# EAGLE board eCVT 507 (EAGLE 9.5.0)
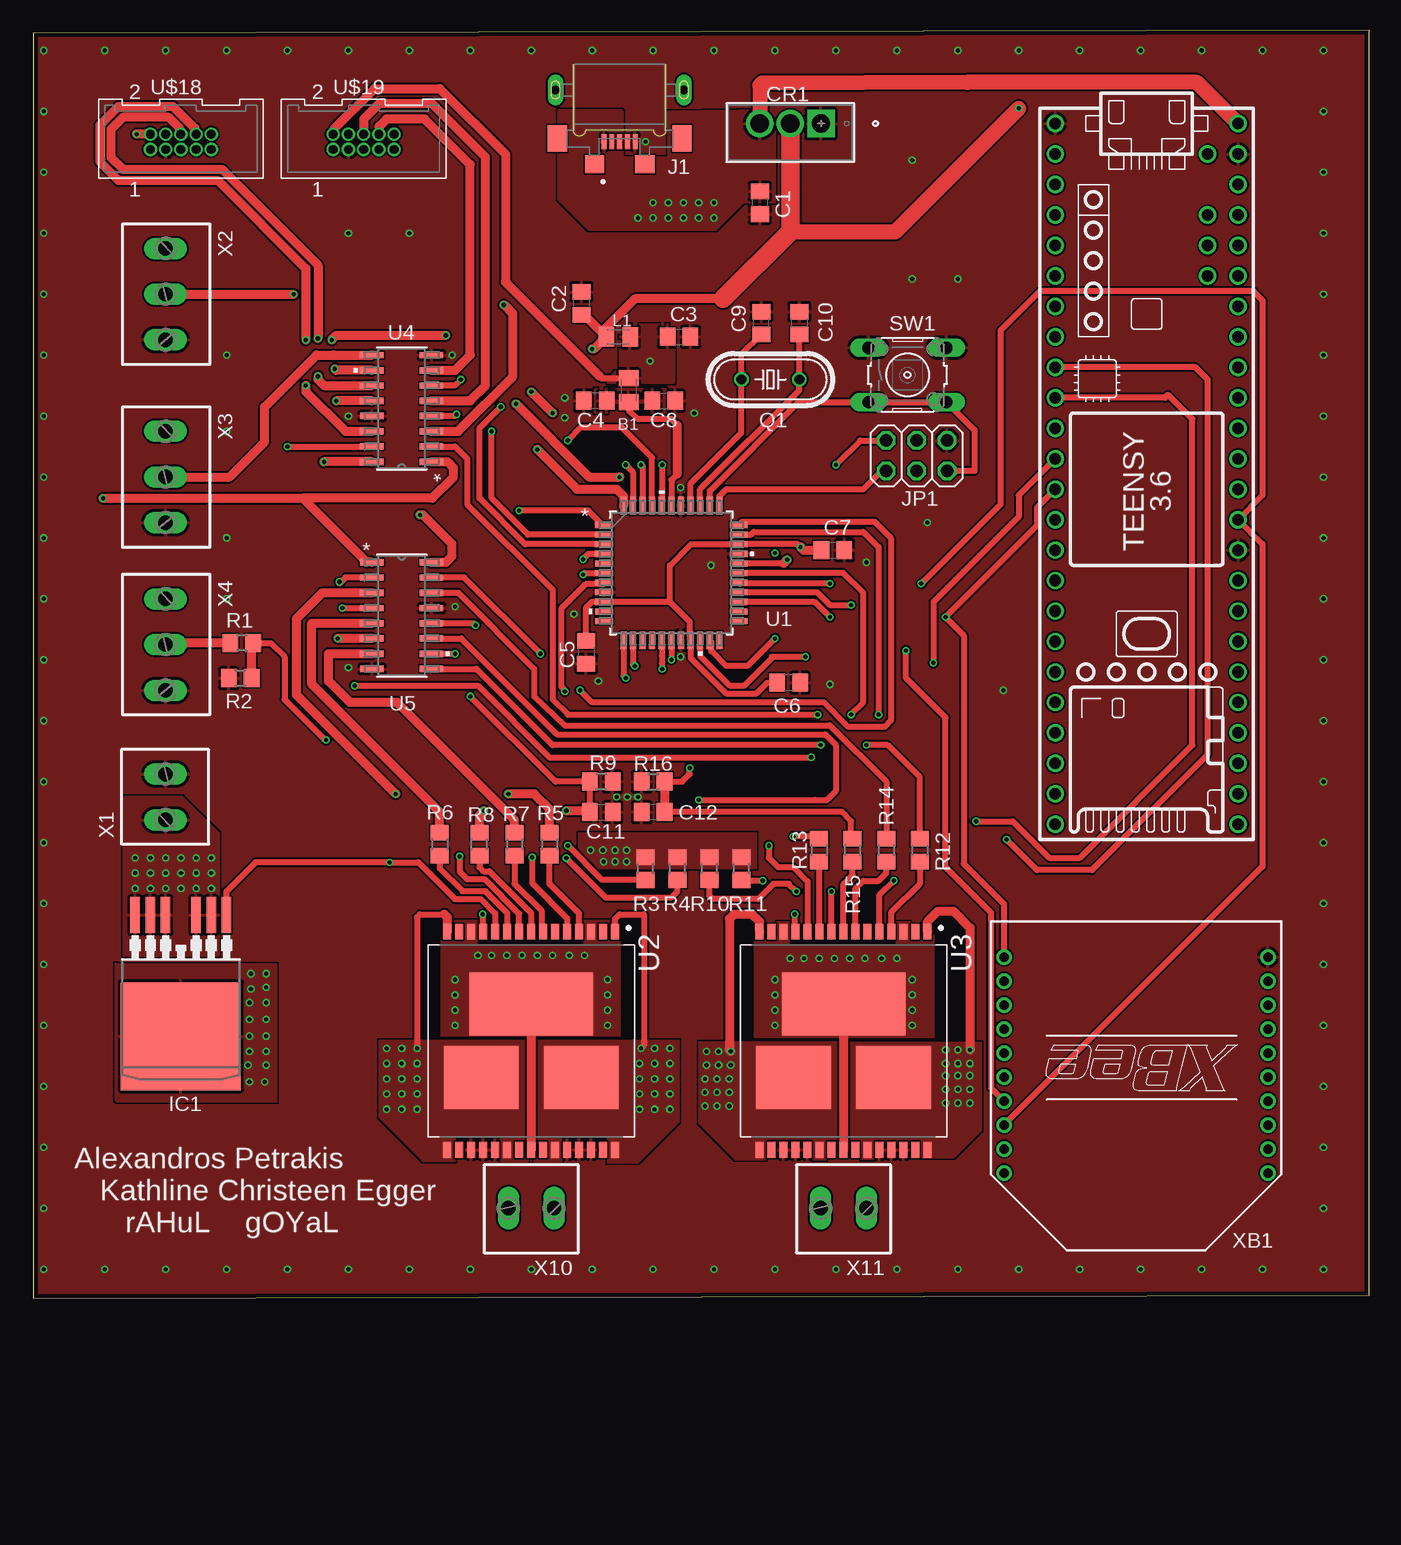
[diagram p0: board, top side]
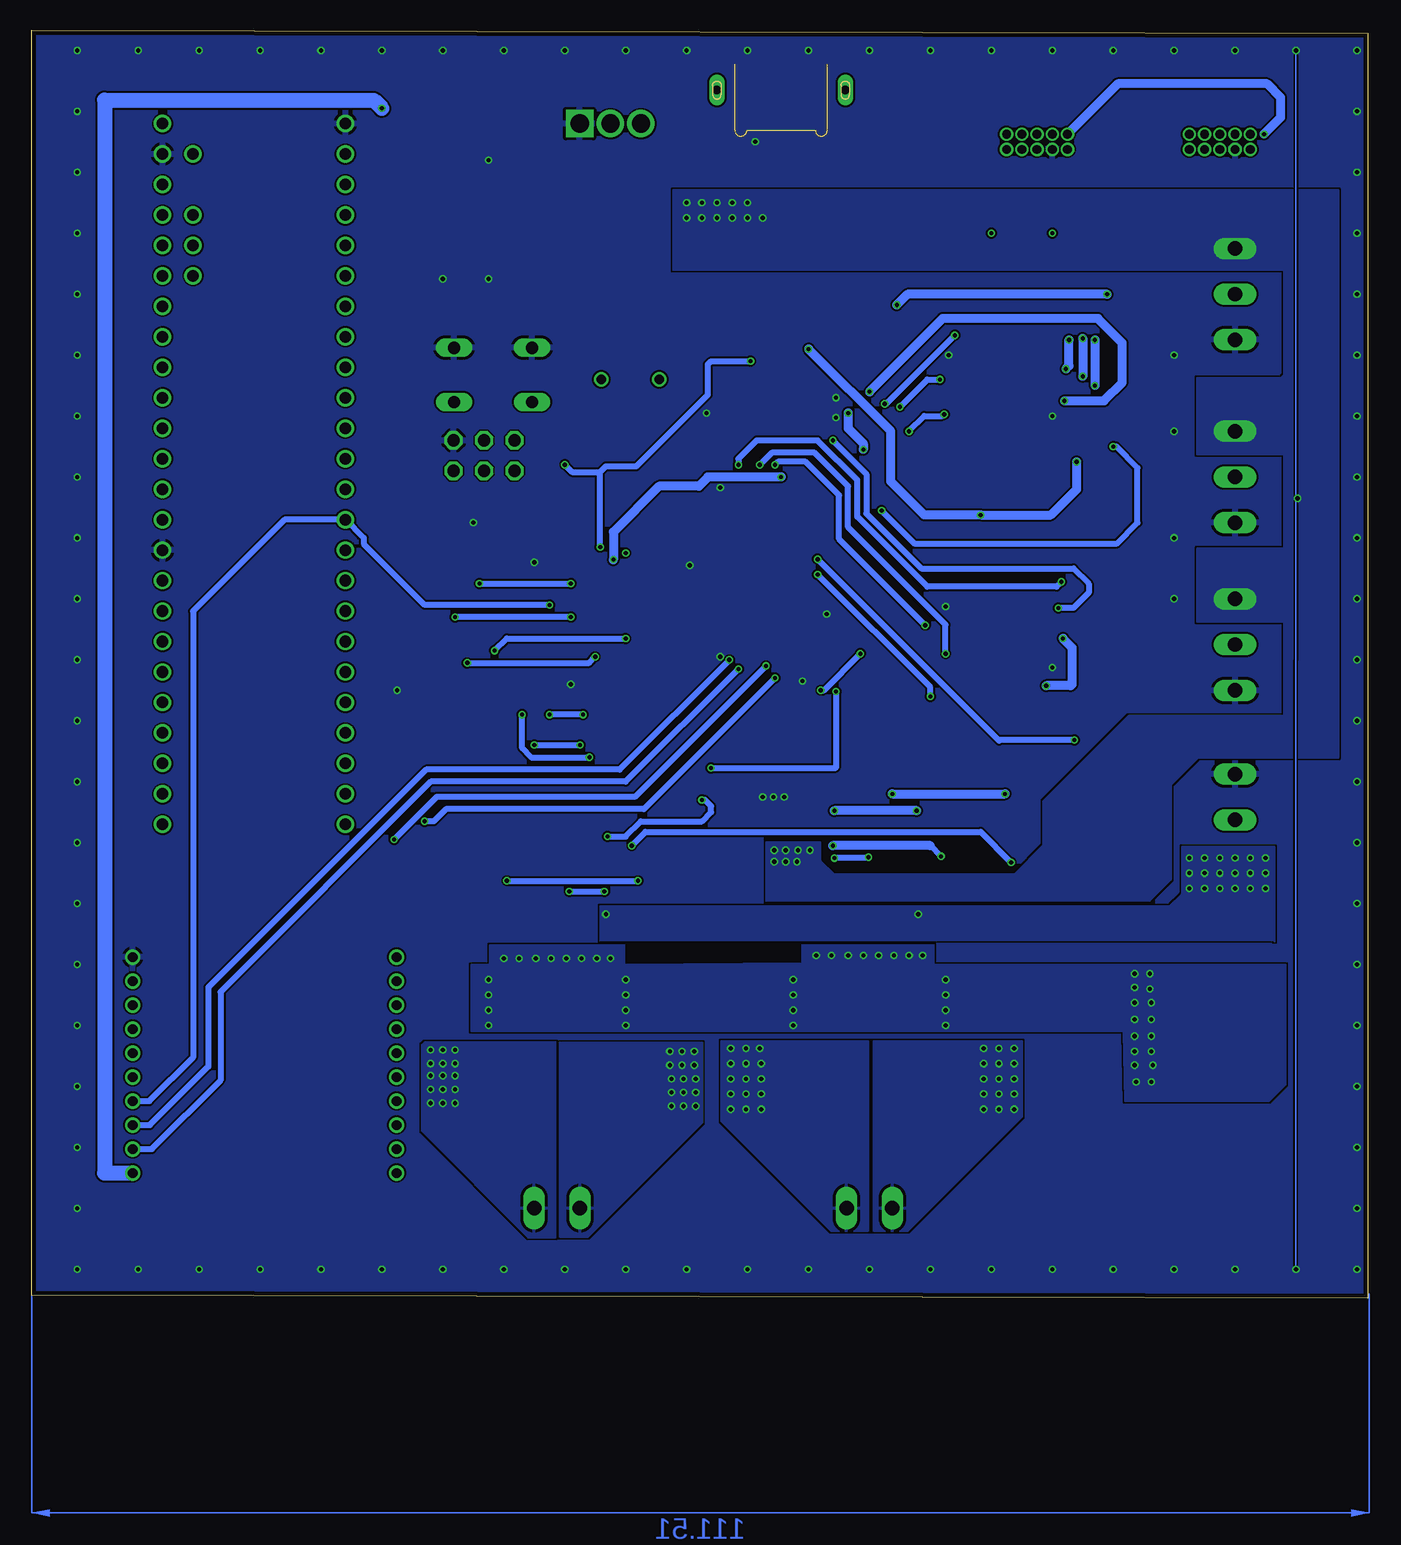
[diagram p1: board, bottom side, seen from below]

Size 111.38 x 105.72 mm. Coordinates in mm from the lower left corner, seen from the top.
Outline: 0,0 111.38,0.25 111.38,105.72 0,105.46 0,0
Copper layers (1*16): Top 0.035559375mm / dielectric 1.6mm / Bottom 0.035559375mm
Design rules "oshpark-2layer *": minimum track width 6mil, minimum drill 10mil, track to track 6mil, track to pad 6mil, pad to pad 6mil, via to via 6mil, smd to smd 6mil, copper to edge 15mil, drill to drill 6mil, minimum pad ring 5mil, minimum via ring 5mil, stop-mask expansion 2.5mil, vias tented up to drill 20mil, thermal gap 10mil

## Footprints (pad centres in the part's own frame; a part is rotated, then mirrored left to right if it is on the bottom)
0805 = smd 1.3 x 1.6: 1 -1,0; 2 1,0
C0805 = smd 1.3 x 1.5: 1 -0.95,0; 2 0.95,0
TO-220 = drill 1.524 pad 2.032 square: 1 -5.105,-1.524 | drill 1.524 pad 2.032: 2 -2.54,-1.524; 3 0,-1.524
PG-TO263-7-3 = smd 0.8 x 3: 1 -3.81,-9.207; 2 -2.54,-9.207; 3 -1.27,-9.207; 5 1.27,-9.207; 6 2.54,-9.207; 7 3.81,-9.207 | smd 10 x 9: 8 0,0.895
CUI_UJ2-MIBH-4-MSMT = smd 1.25 x 0.4: 1 4.325,-1.3; 2 4.325,-0.65; 3 4.325,0; 4 4.325,0.65; 5 4.325,1.3 | drill 0.7 pad 1.3 long: S1 0,5.35; S4 0,-5.35 | smd 2.2 x 1.6: S2 4.05,5.2; S5 4.05,-5.2 | smd 1.5 x 1.6: S3 6.2,2.1; S6 6.2,-2.1
2X03 = drill 1.016 octagon: 1 -2.54,-1.27; 2 -2.54,1.27; 3 0,-1.27; 4 0,1.27; 5 2.54,-1.27; 6 2.54,1.27
HC49/S = drill 0.813: 1 -2.413,0; 2 2.413,0
R0805 = smd 1.3 x 1.5: 1 -0.95,0; 2 0.95,0
B3F-10XX = drill 1.016 long: 1 -3.251,2.261; 2 3.251,2.261; 3 -3.251,-2.261; 4 3.251,-2.261
44A = smd 1.473 x 0.508: 1 -5.613,4; 2 -5.613,3.2; 3 -5.613,2.4; 4 -5.613,1.6; 5 -5.613,0.8; 6 -5.613,0; 7 -5.613,-0.8; 8 -5.613,-1.6; 9 -5.613,-2.4; 10 -5.613,-3.2; 11 -5.613,-4; 23 5.613,-4; 24 5.613,-3.2; 25 5.613,-2.4; 26 5.613,-1.6; 27 5.613,-0.8; 28 5.613,0; 29 5.613,0.8; 30 5.613,1.6; 31 5.613,2.4; 32 5.613,3.2; 33 5.613,4 | smd 0.508 x 1.473: 12 -4,-5.613; 13 -3.2,-5.613; 14 -2.4,-5.613; 15 -1.6,-5.613; 16 -0.8,-5.613; 17 0,-5.613; 18 0.8,-5.613; 19 1.6,-5.613; 20 2.4,-5.613; 21 3.2,-5.613; 22 4,-5.613; 34 4,5.613; 35 3.2,5.613; 36 2.4,5.613; 37 1.6,5.613; 38 0.8,5.613; 39 0,5.613; 40 -0.8,5.613; 41 -1.6,5.613; 42 -2.4,5.613; 43 -3.2,5.613; 44 -4,5.613
IC_VNH5019ATR-E = smd 1.3 x 0.665: 1 -9.1,7; 2 -9.1,6; 3 -9.1,5; 4 -9.1,4; 5 -9.1,3; 6 -9.1,2; 7 -9.1,1; 8 -9.1,0; 9 -9.1,-1; 10 -9.1,-2; 11 -9.1,-3; 12 -9.1,-4; 13 -9.1,-5; 14 -9.1,-6; 15 -9.1,-7; 16 9.1,-7; 17 9.1,-6; 18 9.1,-5; 19 9.1,-4; 20 9.1,-3; 21 9.1,-2; 22 9.1,-1; 23 9.1,0; 24 9.1,1; 25 9.1,2; 26 9.1,3; 27 9.1,4; 28 9.1,5; 29 9.1,6; 30 9.1,7 | smd 5.25 x 10.3: HS1 -3.05,0 | smd 5.25 x 6.23: HS2 3.05,4.165; HS3 3.05,-4.165
SOIC-16 = smd 1.956 x 0.533: 1 -2.477,4.445; 2 -2.477,3.175; 3 -2.477,1.905; 4 -2.477,0.635; 5 -2.477,-0.635; 6 -2.477,-1.905; 7 -2.477,-3.175; 8 -2.477,-4.445; 9 2.477,-4.445; 10 2.477,-3.175; 11 2.477,-1.905; 12 2.477,-0.635; 13 2.477,0.635; 14 2.477,1.905; 15 2.477,3.175; 16 2.477,4.445
TEENSY_3.5/3.6_BASIC = drill 0.965: 0/RX -25.4,-7.62; 1/TX -22.86,-7.62; 2 -20.32,-7.62; 3/CANTX -17.78,-7.62; 3V3 7.62,-7.62; 3V3_LO -22.86,7.62; 4/CANRX -15.24,-7.62; 5 -12.7,-7.62; 6 -10.16,-7.62; 7 -7.62,-7.62; 8 -5.08,-7.62; 9/CS -2.54,-7.62; 10/CS 0,-7.62; 11/MOSI 2.54,-7.62; 12/MISO 5.08,-7.62; 13/SCK 5.08,7.62; 14/A0 2.54,7.62; 15/A1 0,7.62; 16/A2 -2.54,7.62; 17/A3 -5.08,7.62; 18/A4/SDA -7.62,7.62; 19/A5/SCL -10.16,7.62; 20/A6 -12.7,7.62; 21/A7 -15.24,7.62; 21/DAC0 12.7,7.62; 22/A8 -17.78,7.62; 23/A9 -20.32,7.62; 24 10.16,-7.62; 25 12.7,-7.62; 26 15.24,-7.62; 27 17.78,-7.62; 28 20.32,-7.62; 29 22.86,-7.62; 30 25.4,-7.62; 31/A12 27.94,-7.62; 32/A13 30.48,-7.62; 33/A14 30.48,7.62; 34/A15 27.94,7.62; 35/A16 25.4,7.62; 36/A17 22.86,7.62; 37/A18 20.32,7.62; 38/A19 17.78,7.62; 39/A20 15.24,7.62; A10 -17.78,5.08; A11 -15.24,5.08; A22/DAC1 10.16,7.62; AGND -25.4,7.62; AREF -20.32,5.08; GND -27.94,-7.62; GND2 7.62,7.62; VIN -27.94,7.62; VUSB -25.4,5.08
SHF-105-01-X-D-TH = drill 0.737 pad 1.067: 1 -2.54,-0.635; 2 -2.54,0.635; 3 -1.27,-0.635; 4 -1.27,0.635; 5 0,-0.635; 6 0,0.635; 7 1.27,-0.635; 8 1.27,0.635; 9 2.54,-0.635; 10 2.54,0.635
2POL381 = drill 1.2 long: 1 -1.905,0; 2 1.905,0
3POL381 = drill 1.2 long: 1 -3.81,0; 2 0,0; 3 3.81,0
XBEE = drill 0.8 pad 1.27: 1 -11,9; 2 -11,7; 3 -11,5; 4 -11,3; 5 -11,1; 6 -11,-1; 7 -11,-3; 8 -11,-5; 9 -11,-7; 10 -11,-9; 11 11,-9; 12 11,-7; 13 11,-5; 14 11,-3; 15 11,-1; 16 11,1; 17 11,3; 18 11,5; 19 11,7; 20 11,9

## Placement (x,y rotation side)
B1  220@100MHz  [0805]  49.66,75.69 270 top
C1  100nF  [C0805]  60.58,91.31 270 top
C2  10uF  [C0805]  45.72,82.93 90 top
C3  10uF  [C0805]  53.85,80.14 0 top
C4  10uF  [C0805]  46.86,74.8 180 top
C5  0.1uF  [C0805]  46.1,53.85 270 top
C6  0.1uF  [C0805]  62.99,51.31 0 top
C7  0.1uF  [C0805]  66.67,62.36 0 top
C8  0.1uF  [C0805]  52.58,74.8 0 top
C9  30pF  [C0805]  60.71,81.28 90 top
C10  30pF  [C0805]  63.88,81.28 90 top
C11  33 nF  [C0805]  47.37,40.51 0 top
C12  33 nF  [C0805]  51.69,40.51 180 top
CR1  LD1117V33  [TO-220]  60.58,96.39 180 top
IC1  IPB180N06S4-H1  [PG-TO263-7-3]  12.32,22.73 180 top
J1  UJ2-MIBH-4-MSMT  [CUI_UJ2-MIBH-4-MSMT]  48.9,100.71 270 top
JP1  [2X03]  73.66,70.23 0 top
L1  10uH  [0805]  48.77,80.14 0 top
Q1  16MHz 18pF  [HC49/S]  61.47,76.58 0 top
R1  1.7K  [R0805]  17.4,54.61 180 top
R2  3.3K  [R0805]  17.27,51.69 0 top
R3  3.3K  [R0805]  51.05,35.81 90 top
R4  3.3K  [R0805]  53.72,35.81 90 top
R5  1K  [R0805]  43.05,37.85 270 top
R6  1K  [R0805]  33.91,37.85 270 top
R7  1K  [R0805]  40.13,37.85 270 top
R8  10K  [R0805]  37.21,37.85 90 top
R9  1.5K  [R0805]  47.37,43.05 180 top
R10  3.3K  [R0805]  56.39,35.81 90 top
R11  3.3K  [R0805]  59.05,35.81 90 top
R12  1K  [R0805]  73.91,37.34 270 top
R13  1K  [R0805]  65.53,37.34 270 top
R14  1K  [R0805]  71.12,37.34 270 top
R15  10K  [R0805]  68.33,37.34 90 top
R16  1.5K  [R0805]  51.69,43.05 0 top
SW1  SW  [B3F-10XX]  72.9,76.96 0 top
U1  ATXMEGA128A4U-AU  [44A]  53.21,60.45 0 top
U2  VNH5019ATR-E  [IC_VNH5019ATR-E]  41.53,21.46 270 top
U3  VNH5019ATR-E  [IC_VNH5019ATR-E]  67.56,21.46 270 top
U4  MC14504BDR2G  [SOIC-16]  30.73,74.17 180 top
U5  MC14504BDR2G  [SOIC-16]  30.73,56.9 0 top
U$3  TEENSY_3.5/3.6_BASIC  [TEENSY_3.5/3.6_BASIC]  92.84,69.98 270 top
U$18  SHF-105-01-X-D-TH  [SHF-105-01-X-D-TH]  12.32,96.39 0 top
U$19  SHF-105-01-X-D-TH  [SHF-105-01-X-D-TH]  27.56,96.39 0 top
X1  [2POL381]  11.05,41.78 90 top
X2  [3POL381]  11.05,83.69 270 top
X3  [3POL381]  11.05,68.45 270 top
X4  [3POL381]  11.05,54.48 270 top
X10  [2POL381]  41.53,7.49 180 top
X11  [2POL381]  67.56,7.49 180 top
XB1  XBEE  [XBEE]  91.95,19.43 180 top

## Library data of the parts
B1 L1 X1-X4 X10 X11 = ME507
C1-C12 = rcl; SPICEPREFIX: C
CR1 = LD1117V33; MANUFACTURER_PART_NUMBER: LD1117V33; VENDOR: STMicroelectronics
IC1 = infineon
J1 = UJ2-MIBH-4-MSMT; CUI_PURCHASE_URL: https://www.cuidevices.com/product/interconnect/connectors/usb-connectors/uj2-mibh-4-msmt?utm_source=snapeda.com&utm_medium=referral&utm_campaign=snapedaBOM; DESCRIPTION: Micro B, USB 2.0, 1.8 A, Right Angle, Mid Mount _SMT_, USB Receptacle; DIGI-KEY_PART_NUMBER: 102-4008-1-ND; DIGI-KEY_PURCHASE_URL: https://www.digikey.com/product-detail/en/cui-devices/UJ2-MIBH-4-MSMT-TR/102-4008-1-ND/6187930?utm_source=snapeda&utm_medium=aggregator&utm_campaign=symbol; MF: CUI Devices; MP: UJ2-MIBH-4-MSMT-TR; PACKAGE: None
JP1 = pinhead
Q1 = crystal; OC_FARNELL: 1667008; OC_NEWARK: unknown
R1-R16 = rcl; SPICEPREFIX: R
SW1 = ME507; MPN: B3F-1000; OC_FARNELL: 176432; OC_NEWARK: 36M3542
U1 = XMEGA; MANUFACTURER_PART_NUMBER: ATXMEGA128A4UAU; VENDOR: Atmel
U2 U3 = VNH5019ATR-E; DESCRIPTION: Motor / Motion / Ignition Controllers & Drivers Automotive h-Bridge 18mohm 30a 41v Vcc; DIGI-KEY_PART_NUMBER: 497-13073-1-ND; DIGI-KEY_PURCHASE_URL: https://www.digikey.com/product-detail/en/stmicroelectronics/VNH5019ATR-E/497-13073-1-ND/3455763?utm_source=snapeda&utm_medium=aggregator&utm_campaign=symbol; MF: STMicroelectronics; MP: VNH5019ATR-E; PACKAGE: SOP-30 STMicroelectronics
U4 U5 = MC14504BDR2G; MANUFACTURER_PART_NUMBER: MC14504BDR2G; VENDOR: ON Semiconductor
U$3 = Teensy356
U$18 U$19 = SHF-105-01-X-D-TH; DESCRIPTION: SHF Series .050 Shrouded Terminal Strip For FFSD; DIGI-KEY_PART_NUMBER: SAM10711-ND; DIGI-KEY_PURCHASE_URL: https://www.digikey.com/product-detail/en/samtec-inc/SHF-105-01-L-D-TH/SAM10711-ND/6561671?utm_source=snapeda&utm_medium=aggregator&utm_campaign=symbol; MF: Samtec; MP: SHF-105-01-L-D-TH; PACKAGE: None
XB1 = xbee; MPN: XBP24-Z7UIT-004; OC_FARNELL: 1751799; OC_NEWARK: 34R5507

## Nets
+3V3: C2.1 CR1.2 L1.1 U4.16 U5.16 XB1.1
+5V: C1.1 CR1.3 J1.1 R3.2 R4.2 R10.2 R11.2 U4.1 U5.1 U$3.VIN X2.1 X3.1 X4.1
+12V: IC1.2 IC1.3 IC1.5 IC1.6 IC1.7 U2.12 U3.12 X1.1
AVCC: B1.2 C4.1 C8.1 U1.39
BRAKE_PRESSURE: R1.1 R2.2 U1.4
DRIVER_CP: IC1.1 U2.11 U3.11
DRIVER_VCC: IC1.8 U2.3 U2.13 U2.23 U2.HS1 U3.3 U3.13 U3.23 U3.HS1
ENGINE_SPEED: U4.3 X2.2
ENGINE_SPEED_3V3: U1.28 U4.2
GND: C1.2 C2.2 C3.2 C4.2 C5.2 C6.2 C7.2 C8.2 C9.2 C10.2 C11.2 C12.2 CR1.1 J1.5 JP1.6 R2.1 R9.1 R16.1 SW1.1 SW1.2 U1.8 U1.18 U1.30 U1.38 U2.18 U2.19 U2.20 U2.26 U2.27 U2.28 U3.18 U3.19 U3.20 U3.26 U3.27 U3.28 U4.8 U4.13 U5.8 U5.13 U$3.AGND U$3.GND U$3.GND2 U$18.3 U$19.3 X1.2 X2.3 X3.3 X4.3 XB1.10
MISO: U1.26 U$3.12/MISO XB1.4
MOSI: U1.25 U$3.11/MOSI XB1.11
N$1: U1.22
N$2: U1.14
N$3: U1.15
N$4: R11.1 U3.5
N$5: R5.2 U2.4
N$6: R10.1 U3.9
N$7: JP1.3
N$8: U$3.0/RX
N$9: U$3.1/TX
N$10: R4.1 U2.5
N$11: XB1.5
N$12: R6.2 U2.10
N$13: R8.1 U2.8
N$14: JP1.4
N$16: U2.15 U2.16 U2.21 U2.HS3 X10.2
N$17: U2.1 U2.25 U2.30 U2.HS2 X10.1
N$18: R3.1 U2.9
N$19: R7.2 U2.7
N$20: XB1.6
N$21: XB1.9
N$23: U1.24
N$26: U1.5
N$28: R12.2 U3.4
N$29: R13.2 U3.10
N$30: R14.2 U3.7
N$31: R15.1 U3.8
N$33: U3.15 U3.16 U3.21 U3.HS3 X11.2
N$34: U3.1 U3.25 U3.30 U3.HS2 X11.1
N$37: U$18.1
N$38: U$19.1
N$39: R1.2 X4.2
N$40: XB1.14
N$41: XB1.12
N$42: XB1.13
N$43: XB1.15
N$44: XB1.16
N$45: U1.23
N$46: U2.6
N$47: XB1.19
N$48: U1.10
N$50: XB1.20
N$77: U$18.5
N$78: U$18.7
N$79: U$18.9
N$80: U$18.4
N$81: U$18.10
N$82: U$19.5
N$83: U$19.7
N$84: U$19.9
N$85: U$19.4
N$86: U$19.10
N$87: U$3.2
N$88: U$3.3/CANTX
N$89: U$3.4/CANRX
N$90: U$3.5
N$91: U$3.6
N$92: U$3.9/CS
N$93: U$3.3V3
N$94: U$3.24
N$95: U$3.25
N$96: U$3.26
N$97: U$3.27
N$98: U$3.28
N$99: U$3.29
N$100: U$3.30
N$101: U$3.31/A12
N$102: U$3.32/A13
N$103: U$3.33/A14
N$104: U$3.34/A15
N$105: U$3.35/A16
N$106: U$3.36/A17
N$107: U$3.37/A18
N$108: U$3.38/A19
N$109: U$3.39/A20
N$110: U$3.21/DAC0
N$111: U$3.A22/DAC1
N$114: U$3.14/A0
N$115: U$3.15/A1
N$116: U$3.16/A2
N$117: U$3.17/A3
N$118: U$3.18/A4/SDA
N$119: U$3.19/A5/SCL
N$120: U$3.20/A6
N$121: U$3.21/A7
N$122: U$3.22/A8
N$123: U$3.23/A9
N$124: U$3.3V3_LO
N$128: U1.11
N$129: U$3.A11
N$130: U$3.A10
N$131: U$3.AREF
N$132: U$3.VUSB
N$133: U3.6
PDI_DATA: JP1.1 U1.34
PENC_INA: U4.11 U$18.6
PENC_INA_3V3: U1.44 U4.12
PENC_INB: U4.14 U$18.8
PENC_INB_3V3: U1.1 U4.15
PMOT_CS: C11.1 R8.2 R9.2 U1.6
PMOT_INA: R5.1 U5.3
PMOT_INA_3V3: U1.40 U5.2
PMOT_INB: R6.1 U5.5
PMOT_INB_3V3: U1.41 U5.4
PMOT_PWM: R7.1 U5.7
PMOT_PWM_3V3: U1.32 U5.6
RESET/PDI_CLK: JP1.5 SW1.3 SW1.4 U1.35
RWHEEL_SPEED: U4.9 X3.2
RWHEEL_SPEED_3V3: U1.29 U4.10
SCK: U1.27 U$3.13/SCK XB1.18
SENC_INA: U4.5 U$19.6
SENC_INA_3V3: U1.2 U4.4
SENC_INB: U4.7 U$19.8
SENC_INB_3V3: U1.3 U4.6
SMOT_CS: C12.1 R15.2 R16.2 U1.7
SMOT_INA: R12.1 U5.9
SMOT_INA_3V3: U1.42 U5.10
SMOT_INB: R13.1 U5.11
SMOT_INB_3V3: U1.43 U5.12
SMOT_PWM: R14.1 U5.14
SMOT_PWM_3V3: U1.33 U5.15
TEENSY_RX: U1.12 U$3.8
TEENSY_SS: U1.20 U$3.10/CS
TEENSY_TX: U1.13 U$3.7
VCC: B1.1 C3.1 C5.1 C6.1 C7.1 JP1.2 L1.2 U1.9 U1.19 U1.31 U$18.2 U$19.2
XBEE_RX: U1.16 XB1.2
XBEE_SS: U1.21 XB1.17
XBEE_TX: U1.17 XB1.3
XTAL1: C9.1 Q1.1 U1.37
XTAL2: C10.1 Q1.2 U1.36

## Tracks (layer width: path | path; a pad name or v marks a point on that pad's centre or on a via)
+3V3  (via drill 0.35)
  Top 0.762: U4.16 v24.26,69.72 | L1.1 45.87,82.04 C2.1 | L1.1 47.75,80.14 47.75,80.9 50.16,83.31 57.53,83.31 | L1.1 46.75,79.12 v46.61,79.12 | U5.16 34.42,61.34 34.92,61.85 34.92,62.86 32.51,65.28 v32.26,65.28
  Top 1.27: 63.12,88.9 71.88,88.9 v82.17,99.19
  Top 1.524: CR1.2 63.12,88.9 57.53,83.31
  Bottom 0.762: v46.61,79.12 39.75,72.26 39.75,68.07 36.96,65.28 v32.26,65.28 26.42,65.28 24.26,67.44 v24.26,69.72
  Bottom 1.27: XB1.1 105.28,10.43 105.28,99.88 87.25,99.86 82.84,99.86 v82.17,99.19
+5V  (via drill 0.35)
  Top 0.762: v5.84,66.67 22.48,66.67 | U5.1 27.81,61.34 22.48,66.67 | U4.1 34.54,69.72 35.05,69.22 35.05,68.45 33.27,66.67 22.48,66.67
  Top 1.27: U$3.VIN 97.03,101.35 77.86,101.35 77.85,101.36 60.77,101.28 60.58,101.09 CR1.3
  other vias: 46.48,37.34 47.5,37.34 48.51,37.34 50.42,90.04 51.69,90.04 52.96,90.04 54.23,90.04 55.5,90.04 56.77,90.04 56.77,91.31 55.5,91.31 54.23,91.31 52.96,91.31 51.69,91.31 49.47,37.34 49.47,36.39 48.51,36.39 47.56,36.39
  pour Top (no thermals): 45.47,38.73 45.47,35.88 60.33,35.88 60.33,38.73
  pour Top: 61.85,91.31 59.18,91.31 56.9,89.03 46.36,89.03 43.82,91.57 43.82,99.06 49.02,99.06 49.15,98.93 49.15,95.12 52.96,95.12 52.96,98.93 61.72,99.06 61.85,98.93
  pour Bottom (no thermals): 2.41,92.36 57.91,92.36 57.91,85.72 6.98,85.72 6.98,76.96 7.24,76.71 14.22,76.71 14.22,70.36 6.98,70.36 6.98,62.48 14.22,62.48 14.22,56.39 6.98,56.39 6.98,48.51 19.94,48.51 27.05,41.4 27.05,37.72 29.46,35.31 44.45,35.31 45.59,36.45 45.59,37.97 50.16,37.97 50.16,33.15 18.16,33.15 16.38,34.92 16.38,42.8 14.1,45.08 2.41,45.08
+12V  (via drill 0.35)
  Top 0.508: U2.12 37.53,31.94 v37.47,32 | U3.12 63.5,30.63 v63.5,32
  other vias: 8.51,34.16 8.51,35.43 8.51,36.7 9.78,36.7 9.78,35.43 9.78,34.16 11.05,34.16 11.05,35.43 11.05,36.7 12.32,36.7 13.59,36.7 14.86,36.7 14.86,35.43 13.59,35.43 12.32,35.43 12.32,34.16 13.59,34.16 14.86,34.16
  pour Top: 7.49,28.57 15.49,28.57 15.49,38.73 12.45,41.78 7.49,41.78
  pour Bottom: 7.75,37.59 15.49,37.59 15.49,33.66 16.51,32.64 64.01,32.64 64.01,29.84 7.87,29.84 7.75,29.72
AVCC
  Top 0.508: 53.72,68.71 53.21,68.2 U1.39 | 53.72,72.77 53.21,73.28 50.42,73.28 49.66,74.04 B1.2
  Top 0.762: 53.72,68.71 53.72,72.77
  pour Top: 47.88,75.82 52.71,75.82 52.71,73.79 46.86,73.79 46.86,75.82
BRAKE_PRESSURE  (via drill 0.35)
  Top 0.508: R1.1 19.81,54.61 20.95,53.47 20.95,49.91 24.26,46.61 24.51,46.61 v24.44,46.54 | v45.85,61.59 46.3,62.05 U1.4
  Top 0.762: R2.2 18.22,54.48 R1.1
  Bottom 0.508: v24.44,46.54 30.68,46.54 30.73,46.48 v45.85,61.59
DRIVER_CP  (via drill 0.35)
  Top 0.508: IC1.1 16.13,33.91 18.54,36.32 v29.72,36.32 32.13,36.32 35.18,33.27 37.34,33.27 38.53,32.08 U2.11 | U3.11 64.56,33.66 64.56,33.99 64.56,34.75 63.37,35.94 62.1,35.94 61.34,36.7 v61.34,37.72
  Bottom 0.508: v29.72,36.32 32.26,38.86 60.2,38.86 v61.34,37.72
DRIVER_VCC  (via drill 0.35)
  Top 0.762: U2.HS1 U2.23 | U3.HS1 U3.23
  other vias: 19.43,27.05 18.16,27.05 19.43,25.91 18.16,25.78 19.43,24.64 18.03,24.64 19.43,23.24 18.03,23.24 19.43,21.84 18.03,21.84 19.43,20.57 18.03,20.57 19.43,19.43 17.91,19.43 19.3,18.03 18.03,18.03 37.08,28.57 38.23,28.57 39.5,28.57 40.77,28.57 42.04,28.57 43.31,28.57 44.7,28.57 45.97,28.57 63.12,28.32 64.26,28.32 65.53,28.32 66.8,28.32 68.07,28.32 69.34,28.32 70.74,28.32 72.01,28.32 35.18,26.54 35.18,25.27 35.18,24 35.18,22.73 47.88,26.54 47.88,25.27 47.88,24 47.88,22.73 61.85,26.54 61.85,25.27 61.85,24 61.85,22.73 73.28,26.54 73.28,25.27 73.28,24 73.28,22.73
  pour Bottom: 6.86,27.81 6.86,17.78 8.25,16.38 20.19,16.38 20.32,22.23 74.68,22.23 74.68,27.81 73.15,27.81 73.15,29.46 61.98,29.46 61.98,27.81 47.12,27.94 47.12,29.46 36.2,29.46 36.2,27.81
  pour Top: 6.86,27.94 6.86,16.51 6.98,16.38 20.32,16.38 20.32,27.81 6.98,27.81
  pour Top (no thermals): 34.04,21.84 34.04,31.5 36.96,31.5 36.96,29.46 45.97,29.46 45.97,31.5 48.9,31.5 48.9,21.84
  pour Top (no thermals): 60.2,21.72 60.2,31.37 62.99,31.37 62.99,29.34 72.01,29.34 72.01,31.37 75.06,31.37 75.06,21.72
ENGINE_SPEED  (via drill 0.35)
  Top 0.762: X2.2 v21.72,83.69 | v39.24,82.8 40.01,82.04 40.01,76.83 35.43,72.26 U4.3
  Bottom 0.762: v21.72,83.69 38.35,83.69 v39.24,82.8
ENGINE_SPEED_3V3  (via drill 0.35)
  Top 0.508: U4.2 35.18,70.99 36.2,69.98 36.2,66.17 43.31,59.05 43.31,49.91 44.58,48.64 v65.41,48.64 | v68.2,48.64 69.22,49.66 69.22,58.8 67.55,60.46 58.84,60.46 U1.28
  Bottom 0.508: v65.41,48.64 v68.2,48.64
GND  (via drill 0.35)
  other vias: 45.09,57.02 47.12,51.43 56.52,61.09 73.28,94.87 66.42,51.18 0.89,104.01 0.89,93.85 0.89,98.93 0.89,88.77 0.89,83.69 0.89,78.61 0.89,73.53 0.89,68.45 0.89,63.37 0.89,58.29 0.89,53.21 0.89,48.13 0.89,43.05 0.89,37.97 0.89,32.89 0.89,27.81 0.89,22.73 0.89,17.65 0.89,12.57 0.89,7.49 0.89,2.41 5.97,2.41 11.05,2.41 16.13,2.41 21.21,2.41 26.29,2.41 31.37,2.41 36.45,2.41 41.53,2.41 46.61,2.41 51.69,2.41 56.77,2.41 61.85,2.41 66.93,2.41 72.01,2.41 77.09,2.41 82.17,2.41 87.25,2.41 92.33,2.41 97.41,2.41 102.49,2.41 107.57,2.41 107.57,7.49 107.57,12.57 107.57,17.65 107.57,22.73 107.57,27.81 107.57,32.89 107.57,37.97 107.57,43.05 107.57,48.13 107.57,53.21 107.57,58.29 107.57,63.37 107.57,68.45 107.57,73.53 107.57,78.61 107.57,83.69 107.57,88.77 107.57,93.85 107.57,98.93 107.57,104.01 102.49,104.01 97.41,104.01 92.33,104.01 87.25,104.01 82.17,104.01 77.09,104.01 72.01,104.01 66.93,104.01 61.85,104.01 56.77,104.01 51.69,104.01 46.61,104.01 41.53,104.01 36.45,104.01 31.37,104.01 26.29,104.01 21.21,104.01 16.13,104.01 11.05,104.01 5.97,104.01 51.05,96.39 26.29,73.53 26.29,52.58 34.92,78.61 35.18,57.66 55.12,73.79 44.32,73.41 44.32,75.06 53.98,67.56 53.98,53.47 49.53,41.78 48.64,41.78 50.42,41.78 16.13,58.29 16.13,63.37 16.13,72.26 16.13,78.61 26.29,88.77 31.37,88.77 73.28,84.96 77.09,84.96 74.55,64.64 80.9,50.67 69.47,61.34
  pour Top (rank 6): -1.4,104.27 -1.4,-0.13 113.28,-0.13 113.28,105.28 -0.38,105.28
  pour Bottom (rank 6): -0.13,106.05 -0.13,-0.89 114.17,-0.89 114.17,106.3 0.13,106.3
MISO  (via drill 0.35)
  Top 0.508: U1.26 65.35,58.85 66.42,57.78 v68.2,57.78
  Bottom 0.508: v68.2,57.78 78.61,57.78 83.69,62.86 83.69,63.37 U$3.12/MISO 90.3,64.9 97.92,57.28 97.92,20.07 101.55,16.43 XB1.4
MOSI  (via drill 0.35)
  Top 0.508: U1.25 65.14,58.05 v66.42,56.77 | U$3.11/MOSI 83.69,65.91 83.69,64.39 v76.07,56.77 77.6,55.24 77.6,36.19 80.95,32.84 XB1.11
  Bottom 0.508: v66.42,56.77 v76.07,56.77
N$4  (via drill 0.35)
  Top 0.508: U3.5 70.56,33.61 v71.75,34.8 | v60.83,34.8 59.12,34.8 R11.1
  Bottom 0.508: v71.75,34.8 v60.83,34.8
N$5
  Top 0.508: R5.2 43.05,34.54 45.53,32.07 U2.4
N$6  (via drill 0.35)
  Top 0.508: U3.9 66.55,30.58 v66.55,33.91 | v63.63,33.91 62.99,34.54 61.72,34.54 60.45,33.27 56.64,33.27 56.39,33.53 R10.1
  Bottom 0.508: v66.55,33.91 v63.63,33.91
N$10  (via drill 0.35)
  Top 0.508: v44.45,36.68 47.73,33.4 53.21,33.4 53.72,33.91 R4.1 | v41.61,36.76 41.61,34.59 44.53,31.67 U2.5
  Bottom 0.508: v41.61,36.76 41.66,36.7 44.45,36.7 v44.45,36.68
N$12
  Top 0.508: R6.2 33.91,35.81 35.79,33.93 37.69,33.93 39.53,32.1 U2.10
N$13
  Top 0.508: R8.1 37.21,35.94 37.57,35.58 38.04,35.58 41.53,32.09 U2.8
N$15  (via drill 0.35)
  other vias: 61.85,62.1
N$16  (via drill 0.35)
  Top 0.508: v32,20.83 32,31.75 32.26,32 34.29,32
  Top 0.762: 34.29,32 34.53,31.77 U2.15
  other vias: 29.46,15.75 30.73,15.75 32,15.75 29.46,17.02 30.73,17.02 32,17.02 32,18.29 30.73,18.29 29.46,18.29 29.46,19.56 30.73,19.56 32,19.56 30.73,20.83 29.46,20.83
  pour Top (no thermals): 41.27,21.46 28.83,21.46 28.83,15.11 32.5,11.44 35.18,11.44 35.18,13.59 38.99,13.59 38.99,11.3 41.27,11.3
  pour Bottom: 28.83,21.46 28.83,15.11 38.35,5.59 41.15,5.59 41.15,21.46
N$17  (via drill 0.35)
  Top 0.508: U2.1 48.53,31.61 48.51,31.62 48.9,32 50.93,32 50.93,21.08 v50.67,20.83
  other vias: 53.09,20.83 51.82,20.83 53.09,19.56 51.82,19.56 50.55,19.56 53.09,18.29 51.82,18.29 50.55,18.29 50.55,17.02 51.82,17.02 53.09,17.02 53.09,15.75 51.82,15.75 50.55,15.75
  pour Bottom: 41.66,21.46 41.66,5.59 44.7,5.59 53.85,14.73 53.85,21.46
  pour Top (no thermals): 41.78,21.46 41.78,11.3 44.07,11.3 44.07,13.59 47.88,13.59 47.88,11.3 50.42,11.3 53.85,14.73 53.85,21.46
N$18  (via drill 0.35)
  Top 0.508: R3.1 47.43,34.86 v44.58,37.72 | v35.56,36.83 35.56,35.56 36.2,34.92 37.64,34.92 40.53,32.03 U2.9
  Bottom 0.508: v35.56,36.83 36.45,37.72
  Bottom 0.762: 36.45,37.72 v44.58,37.72
N$19
  Top 0.508: R7.2 40.13,34.54 42.42,32.26 42.42,30.67 U2.7
N$28
  Top 0.508: U3.4 71.56,32.19 73.91,34.54 R12.2
N$29
  Top 0.508: U3.10 65.56,36.36 R13.2
N$30
  Top 0.508: U3.7 68.56,34.15 69.22,34.8 70.48,34.8 71.12,35.43 R14.2
N$31
  Top 0.508: U3.8 67.56,34.54 68.33,35.31 R15.1
N$33  (via drill 0.35)
  Top 0.762: U3.15 60.56,31.38 59.94,32 58.42,32 58.04,31.62 58.04,20.7 v58.17,20.57
  other vias: 56.13,20.57 57.15,20.57 58.17,19.43 57.15,19.43 56.13,19.43 56.01,18.29 57.02,18.29 58.04,18.29 58.04,17.14 57.02,17.14 56.01,17.14 56.01,16 57.02,16 58.04,16
  pour Top (no thermals): 67.18,21.34 55.5,21.34 55.5,14.61 58.55,11.56 61.09,11.56 61.09,13.21 61.21,13.34 65.02,13.34 65.02,11.56 67.18,11.56
  pour Bottom: 67.31,21.34 55.5,21.34 55.5,14.61 65.02,5.08 67.31,5.08
N$34  (via drill 0.35)
  Top 0.762: U3.1 74.56,31.38 75.44,32.26 76.71,32.26 78.11,30.86 v78.11,20.7
  other vias: 77.09,20.7 76.07,20.7 76.07,19.56 77.09,19.56 78.11,19.56 78.11,18.54 77.09,18.54 76.07,18.54 76.07,17.4 77.09,17.4 78.11,17.4 78.11,16.26 77.09,16.26 76.07,16.26
  pour Bottom: 67.69,5.08 67.69,21.34 78.61,21.34 78.87,21.08 78.87,13.97 69.98,5.08
  pour Top (no thermals): 67.82,11.56 67.82,21.34 78.99,21.34 78.99,13.97 76.71,11.68 74.04,11.68 74.04,13.21 69.98,13.21 69.98,11.56
N$39
  Top 0.762: R1.2 11.18,54.61 X4.2
PDI_DATA
  Top 0.508: U1.34 57.21,66.86 57.79,67.44 69.22,67.44 70.74,68.96 JP1.1
PENC_INA  (via drill 0.35)
  Top 0.762: U$18.6 12.21,97.14 12.21,97.51 11.29,98.42 7.49,98.42 6.48,97.41 6.48,95.12 7.49,94.11 15.75,94.11 23.75,86.11 v23.75,80.01 | v23.75,76.83 23.75,76.58 24.26,76.07 U4.11
  Bottom 0.762: v23.75,80.01 v23.75,76.83
PENC_INA_3V3  (via drill 0.35)
  Top 0.762: U4.12 v25.27,74.8 | v42.04,70.74 45.34,67.44 48.64,67.44 49.21,66.86 U1.44 | v41.53,75.56 v43.31,73.79
  Bottom 0.762: v25.27,74.8 21.97,74.8 20.45,76.33 20.45,79.63 22.48,81.66 35.43,81.66 v41.53,75.56 | v43.31,73.79 43.31,72.52 42.04,71.25 v42.04,70.74
PENC_INB  (via drill 0.35)
  Top 0.762: U$18.8 13.47,97.14 13.47,97.53 11.67,99.34 7.11,99.34 5.56,97.79 5.56,94.74 7.11,93.19 15.37,93.19 22.73,85.83 v22.73,79.88 | v22.73,76.07 22.73,75.56 26.04,72.26 U4.14
  Bottom 0.762: v22.73,79.88 v22.73,76.07
PENC_INB_3V3  (via drill 0.35)
  Top 0.508: v21.21,70.99 U4.15 | v40.51,65.66 46.27,65.66 47.47,64.45 U1.1
  Bottom 0.508: v21.21,70.99 20.95,70.99 19.18,69.22 19.18,64.64 20.95,62.86 37.72,62.86 v40.51,65.66
PMOT_CS  (via drill 0.35)
  Top 0.508: v36.45,50.16 43.56,43.05 R9.2 C11.1 | v45.85,60.32 45.97,60.45 U1.6
  Top 0.762: R8.2 37.21,40.26 v37.59,40.64 | v44.45,40.64 46.29,40.64 C11.1
  Bottom 0.508: v36.45,50.16 36.45,50.93 v45.85,60.32
  Bottom 0.762: v37.59,40.64 v44.45,40.64
PMOT_INA  (via drill 0.35)
  Top 0.762: R5.1 43.05,40.77 41.78,42.04 v39.62,42.04 | v30.23,42.04 21.97,50.29 21.97,56.64 24.13,58.8 U5.3
  Bottom 0.762: v39.62,42.04 v30.23,42.04
PMOT_INA_3V3  (via drill 0.35)
  Top 0.508: U5.2 26.04,60.07 25.55,59.59 25.53,59.59 v25.53,59.71 | v52.45,69.47 52.45,67.28 52.43,67.25 52.43,66.08 U1.40
  Bottom 0.508: v25.53,59.71 25.93,59.31 36.7,59.31 42.55,65.15 42.55,68.2 45.85,71.5 50.93,71.5 52.45,69.98 v52.45,69.47
PMOT_INB
  Top 0.762: R6.1 33.91,40.51 23.24,51.18 23.24,56.26 U5.5
PMOT_INB_3V3  (via drill 0.35)
  Top 0.508: U1.41 51.61,70.05 49.09,72.58 45.66,72.58 v44.58,71.5 | v25.78,57.53 U5.4
  Bottom 0.508: v44.58,71.5 41.78,68.71 41.78,65.41 37.21,60.83 24.51,60.83 23.24,59.56 23.24,58.8 24.51,57.53 v25.78,57.53
PMOT_PWM
  Top 0.762: R7.1 40.13,39.88 30.35,49.66 26.42,49.66 24.64,51.43 24.64,53.72 U5.7
PMOT_PWM_3V3  (via drill 0.35)
  Top 0.508: v26.8,51.05 37.08,51.05 43.05,45.08 v64.87,45.08 | v70.48,48.64 70.48,62.61 69.22,63.88 60.07,63.88 59.84,63.65 U1.32
  Top 0.762: U5.6 v25.4,54.99
  Bottom 0.508: v64.87,45.08 69.72,45.08 70.48,45.85 v70.48,48.64
  Bottom 0.762: v25.4,54.99 24.64,54.23 24.64,51.18 24.76,51.05 v26.8,51.05
RESET/PDI_CLK
  Top 0.508: U1.35 56.41,67.29 63.8,74.68 69.65,74.68 SW1.3 SW1.4 78.49,72.36 78.49,68.96 JP1.5
RWHEEL_SPEED
  Top 0.762: X3.2 16.38,68.45 19.3,71.37 19.3,74.3 23.62,78.61 25.02,78.61 U4.9
RWHEEL_SPEED_3V3  (via drill 0.35)
  Top 0.508: 62.56,61.25 U1.29
  Top 0.762: v25.15,77.47 25.27,77.34 U4.10 | v24.89,79.88 25.27,80.26 v34.42,80.26 | v62.87,61.56 62.56,61.25 | v40.26,74.55 46.36,68.45 v48.9,68.45
  Bottom 0.508: v34.42,80.26 40.13,74.55 v40.26,74.55
  Bottom 0.762: v25.15,77.47 24.89,77.72 v24.89,79.88 | v48.9,68.45 54.99,68.45 55.75,67.69 59.05,67.69 62.87,63.88 v62.87,61.56
SCK  (via drill 0.35)
  Top 0.508: v74.04,59.56 80.64,66.17 80.64,80.64 83.95,83.95 101.73,83.95 102.49,83.19 102.49,66.93 U$3.13/SCK 102.49,62.86 102.49,35.97 XB1.18 | v66.42,59.56 58.91,59.56 U1.27
  Bottom 0.508: v74.04,59.56 v66.42,59.56
SENC_INA
  Top 0.762: U4.5 36.45,74.8 37.72,76.07 37.72,95.12 33.27,99.57 28.83,99.57 27.56,98.3 U$19.6
SENC_INA_3V3  (via drill 0.35)
  Top 0.508: U1.2 41.25,63.65 38.23,66.67 v38.23,72.26 | v35.3,73.67 35.16,73.53 U4.4
  Bottom 0.508: v38.23,72.26 36.96,73.53 35.43,73.53 v35.3,73.67
SENC_INB
  Top 0.762: U4.7 35.18,77.34 36.45,78.61 36.45,94.49 32.64,98.3 29.46,98.3 28.83,97.66 U$19.8
SENC_INB_3V3  (via drill 0.35)
  Top 0.508: U1.3 41.03,62.85 37.21,66.67 37.21,72.52 v38.99,74.3 | v35.66,76.58 35.16,76.07 U4.6
  Bottom 0.508: v38.99,74.3 36.7,76.58 v35.66,76.58
SMOT_CS  (via drill 0.35)
  Top 0.508: R15.2 68.2,38.41 68.2,39.75 67.44,40.51 C12.1 | R16.2 54.1,43.05 54.74,43.69 v54.74,44.2 | v44.32,50.57 44.38,50.62 44.07,50.93 44.07,57.53 46.06,59.52 47.47,59.52 U1.7
  Top 0.762: R16.2 C12.1
  Bottom 0.508: v54.74,44.2 44.32,44.2 v44.32,50.57
SMOT_INA  (via drill 0.35)
  Top 0.508: U5.9 36.96,52.45 43.31,46.1 v65.66,46.1 | R12.1 73.91,43.43 71.25,46.1 v69.47,46.1
  Bottom 0.508: v69.47,46.1 v65.66,46.1
SMOT_INA_3V3  (via drill 0.35)
  Top 0.508: U5.10 v35.18,53.72 | v50.67,69.47 50.81,69.33 U1.42
  Bottom 0.508: v35.18,53.72 35.18,56.13 43.31,64.26 43.31,67.69 46.1,70.48 49.66,70.48 v50.67,69.47
SMOT_INB  (via drill 0.35)
  Top 0.508: R13.1 65.34,38.48 v63.37,38.48 | v55.5,41.53 65.15,41.53 66.17,41.53 66.93,42.29 66.93,46.1 66.04,46.99 43.69,46.99 35.69,54.99 U5.11
  Bottom 0.508: v55.5,41.53 55.25,41.53 54.74,41.02 54.74,40.51 55.5,39.75 60.58,39.75 61.85,38.48 v63.37,38.48
SMOT_INB_3V3  (via drill 0.35)
  Top 0.508: U5.12 36.7,56.26 v36.88,56.09 | v49.4,69.47 50.01,68.86 U1.43
  Bottom 0.508: v36.88,56.09 44.07,63.28 44.07,66.93 46.86,69.72 49.15,69.72 v49.4,69.47
SMOT_PWM
  Top 0.508: R14.1 71.12,43.05 66.42,47.75 44.31,47.75 41.78,50.14 41.78,52.45 35.43,58.8 U5.14
SMOT_PWM_3V3  (via drill 0.35)
  Top 0.508: U1.33 59.08,64.71 70.17,64.71 71.5,63.37 71.5,48.13 70.99,47.62 67.95,47.62 65.91,49.66 46.61,49.66 v45.59,50.67 | v42.29,53.72 35.94,60.07 U5.15
  Bottom 0.508: v45.59,50.67 45.34,50.67 v42.29,53.72
TEENSY_RX  (via drill 0.35)
  Top 0.508: U1.12 49.21,51.88 v49.4,51.69 | U$3.8 94.36,75.06 94.62,75.31 96.65,73.28 96.65,46.1 87.25,36.7 84.71,36.7 81.66,39.75 v78.61,39.75
  Bottom 0.508: v49.4,51.69 60.33,40.77 76.84,40.77 77.85,39.75 v78.61,39.75
TEENSY_SS  (via drill 0.35)
  Top 0.508: U1.20 55.61,53.51 58.05,51.08 59.31,51.08 61.59,53.36 61.59,53.47 v64.39,53.47 | v75.06,52.96 75.06,58.04 82.17,65.15 82.17,66.93 U$3.10/CS
  Bottom 0.508: v75.06,52.96 64.9,52.96 v64.39,53.47
TEENSY_TX  (via drill 0.35)
  Top 0.508: U1.13 50.01,52.86 v50.16,52.7 | v81.15,38.23 83.69,35.69 88.27,35.69 97.92,45.34 97.92,76.58 96.9,77.6 U$3.7
  Bottom 0.508: v50.16,52.7 61.09,41.78 77.6,41.78 v81.15,38.23
VCC  (via drill 0.35)
  Top 0.508: C5.1 46.1,57.57 46.58,58.05 U1.9 53.07,58.05 | 53.07,58.05 54.74,56.39 54.74,54.91 U1.19 54.81,53.38 57.77,50.42 60.33,50.42 61.21,51.31 C6.1 | 53.07,58.05 53.09,58.06 53.09,61.09 54.85,62.85 U1.31 58.84,62.86 63.72,62.86 v63.97,62.61 | JP1.2 68.96,71.5 v66.93,69.47 | 47.18,76.9 47.39,76.69 B1.1
  Top 0.762: U$18.2 v8.64,97.03 | U$19.2 25.13,97.14 25.13,97.51 28.46,100.84 33.91,100.84 39.37,95.38 39.37,84.71 47.18,76.9 | v63.97,62.61 64.23,62.36 C7.1
  Bottom 0.508: v51.44,78.1 54.74,78.1 54.99,77.85 54.99,75.31 60.96,69.34 63.5,69.34 63.97,68.87 | v63.97,62.61 63.97,68.87 | v66.93,69.47 66.33,68.87 63.97,68.87
  Bottom 0.762: U$19.2 20.83,101.22 8.38,101.22 7.24,100.08 7.24,98.42 v8.64,97.03
  pour Top: 47.88,76.33 53.47,76.33 53.47,81.15 49.15,81.15 48.9,80.9 48.9,77.6 47.88,76.58
XBEE_RX  (via drill 0.35)
  Top 0.508: U1.16 52.45,54.8 52.45,53.56 52.43,53.54 52.43,52.89 52.45,52.86 v52.45,52.45
  Bottom 0.508: v52.45,52.45 61.85,43.05 78.11,43.05 95.63,25.53 95.63,18.16 101.36,12.43 XB1.2
XBEE_SS  (via drill 0.35)
  Top 0.508: XB1.17 79.88,17.5 79.88,32.13 76.07,35.94 76.07,48.39 72.77,51.69 v72.77,53.97 | v61.85,54.99 59.56,52.7 57.78,52.7 56.55,53.93 56.55,54.7 U1.21
  Bottom 0.508: v72.77,53.97 71.75,54.99 v61.85,54.99
XBEE_TX  (via drill 0.35)
  Top 0.508: U1.17 v53.21,53.21
  Bottom 0.508: v53.21,53.21 62.36,44.07 78.49,44.07 96.65,25.91 96.65,19.3 101.52,14.43 XB1.3
XTAL1
  Top 0.508: U1.37 54.81,67.89 59.05,72.14 Q1.1 59.05,78.68 C9.1
XTAL2
  Top 0.508: U1.36 55.61,67.42 63.88,75.69 Q1.2 C10.1
(copper drawn outside any net)
  shapes: Bottom area x2

## Text on the board
tNames: Alexandros Petrakis / Kathline Christeen Egger / rAHuL gOYaL